# EAGLE board comboPolferYost (EAGLE 7.2.0)
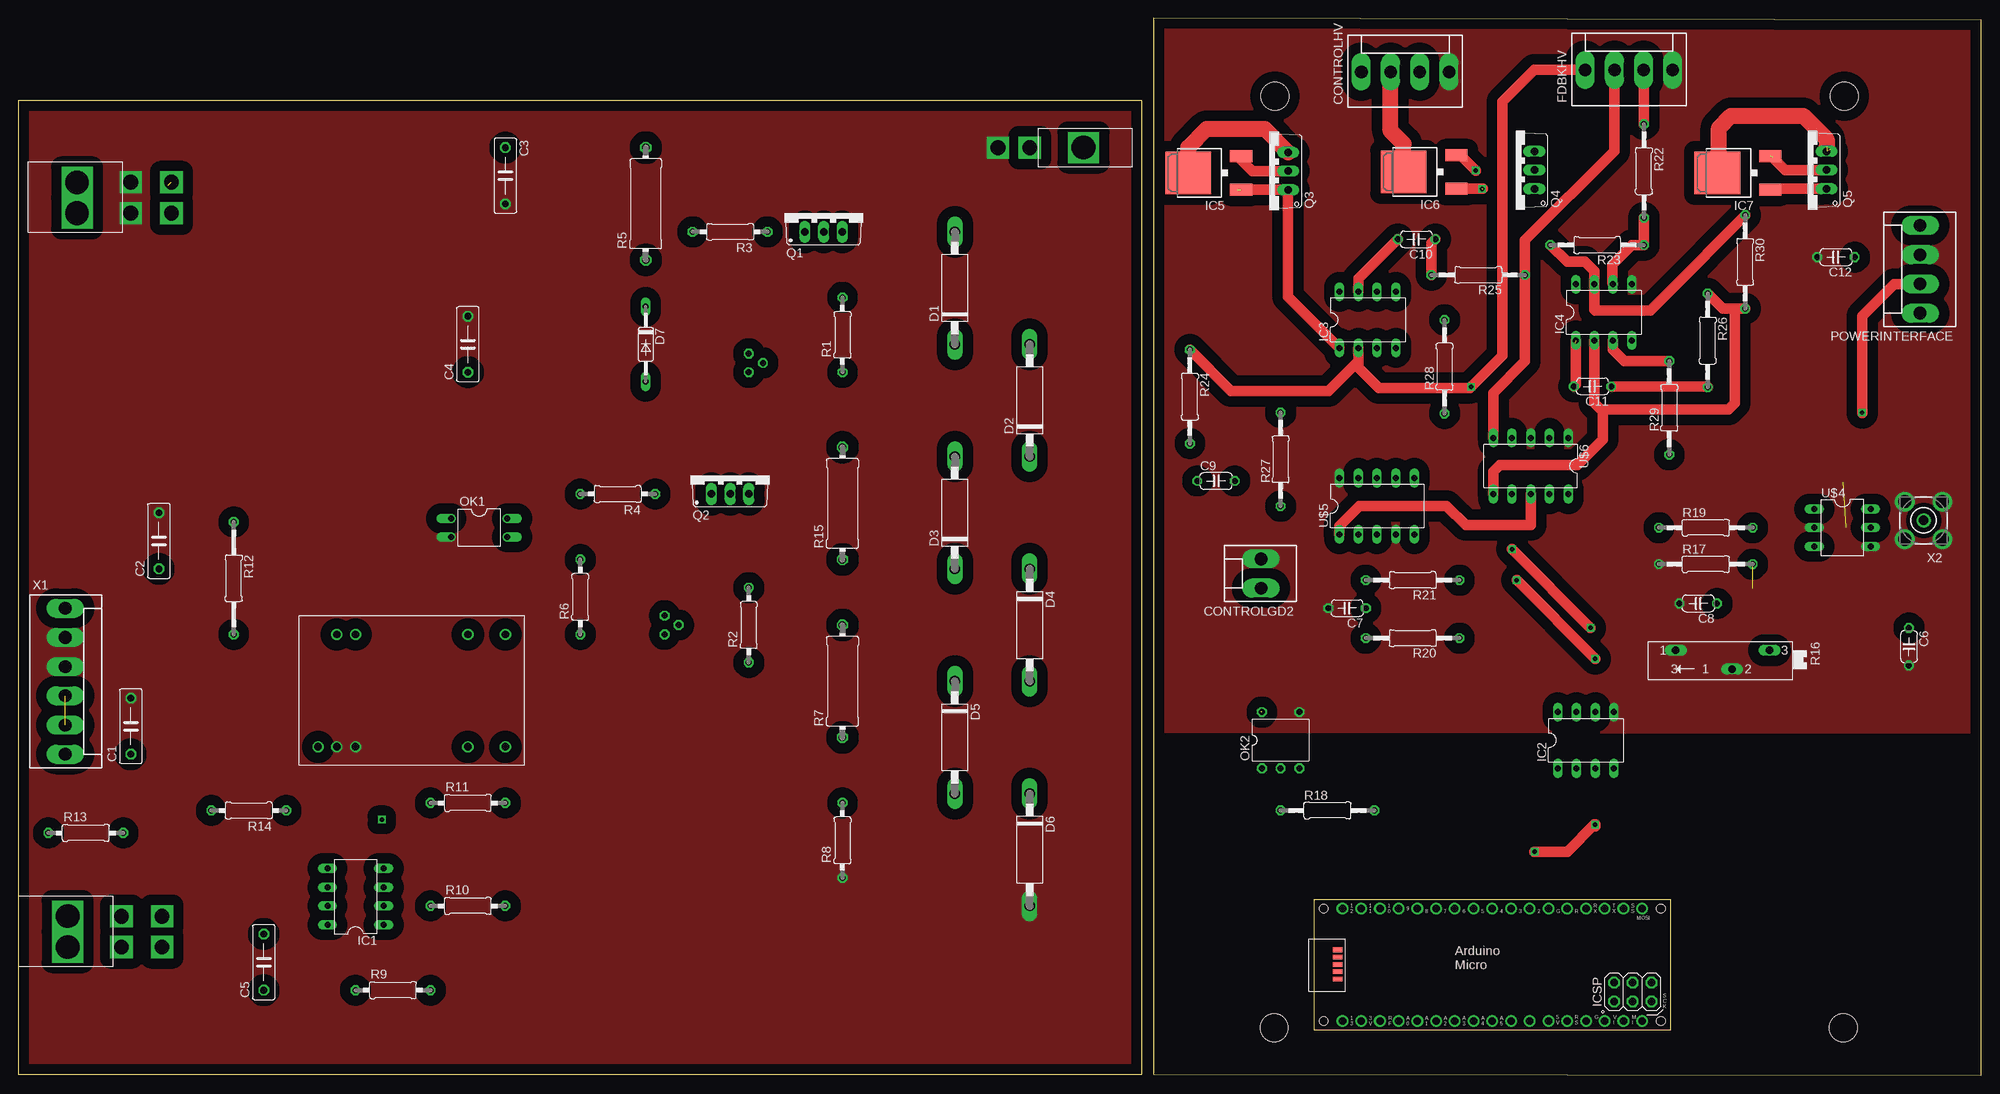
[diagram p0: board, top side]
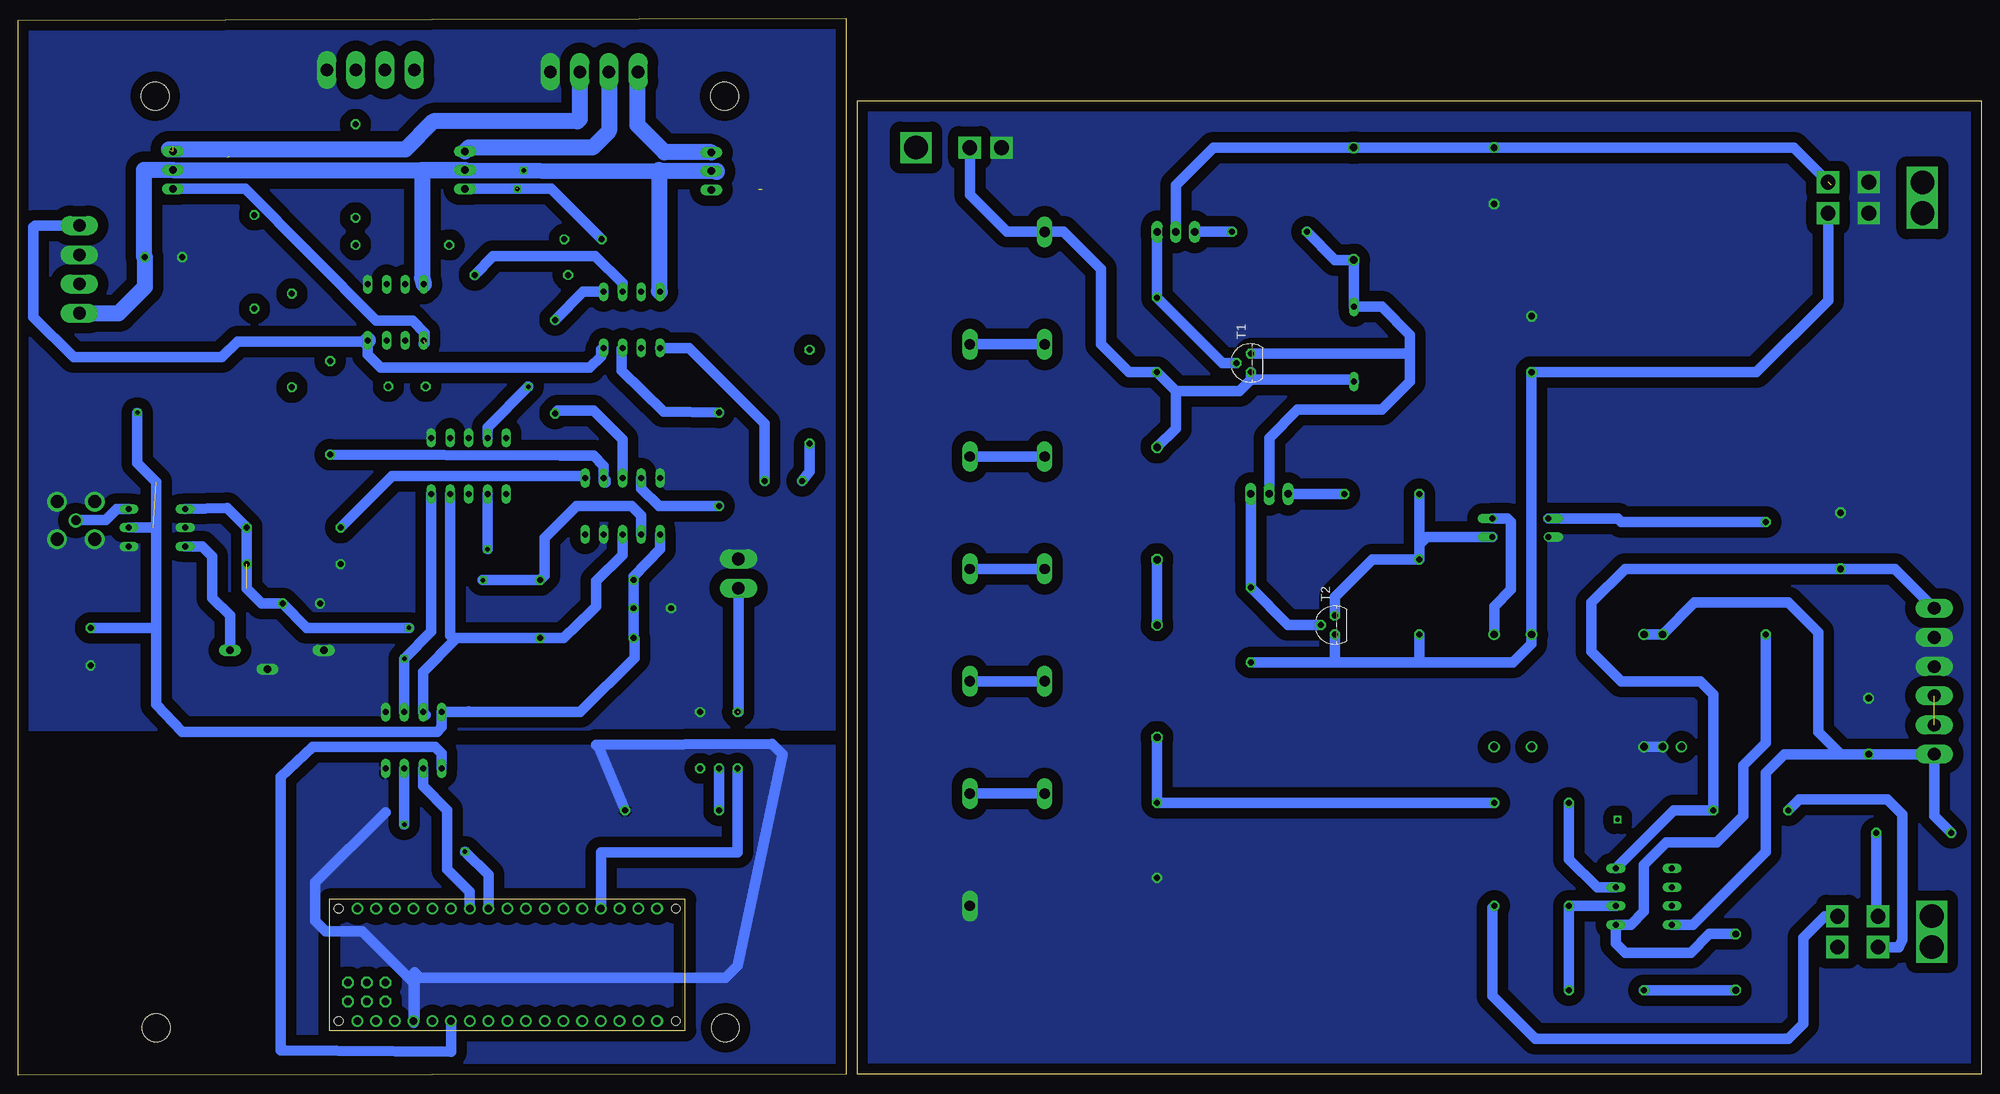
[diagram p1: board, bottom side, seen from below]

Size 266.19 x 143.38 mm. Coordinates in mm from the lower left corner, seen from the top.
Outline: 0,0.13 152.4,0.13 152.4,132.21 0,132.21 0,0.13
Outline: 153.92,0.13 266.19,0 266.19,143.13 153.92,143.38 153.92,0.13
Copper layers (1*16): Top 0.035mm / dielectric 1.5mm / Bottom 0.035mm
Design rules "default": minimum track width 10mil, minimum drill 24mil, track to track 8mil, track to pad 8mil, pad to pad 8mil, via to via 8mil, smd to smd 8mil, copper to edge 40mil, drill to drill 8mil, minimum pad ring 10mil, minimum via ring 8mil, stop-mask expansion 4mil, vias tented up to drill 0mil, thermal gap 10mil
Holes 3.8 mm at 247.52,6.48 247.65,132.84 170.43,132.84 170.31,6.48

## Footprints (pad centres in the part's own frame; a part is rotated, then mirrored left to right if it is on the bottom)
C075-032X103 = drill 0.914 octagon: 1 -3.81,0; 2 3.81,0
C050-024X044 = drill 0.813 octagon: 1 -2.54,0; 2 2.54,0
KK-156-2 = drill 1.7 pad 2.184 long: 1 -1.98,0; 2 1.98,0
KK-156-4 = drill 1.7 pad 2.184 long: 1 -5.94,0; 2 -1.98,0; 3 1.98,0; 4 5.94,0
CB417-15 = drill 1.397 long: A 7.62,0; C -7.62,0
DO35-10 = drill 0.813 long: A 5.08,0; C -5.08,0
NCS = drill 1: P$1 0,0; P$2 2.54,0; P$3 5.08,0; P$4 20.32,0; P$5 25.4,0; P$6 25.4,15.24; P$7 20.32,15.24; P$8 5.08,15.24; P$9 2.54,15.24
DIL08 = drill 0.813 long: 1 -3.81,-3.81; 2 -1.27,-3.81; 3 1.27,-3.81; 4 3.81,-3.81; 5 3.81,3.81; 6 1.27,3.81; 7 -1.27,3.81; 8 -3.81,3.81
DPACK = smd 1.6 x 3: 1 -2.28,-4.8; 3 2.28,-4.8 | smd 5.8 x 6.2: 4 0,2.38
DIL04 = drill 0.813 offset: 1 -1.27,-3.81; 2 1.27,-3.81; 3 1.27,3.81; 4 -1.27,3.81
DIL05 = drill 0.813 octagon: 1 -2.54,-3.81; 2 0,-3.81; 3 2.54,-3.81; 4 2.54,3.81; 6 -2.54,3.81
ARDUINO_MICRO = drill 1.016 pad 1.575: 3V3 6.35,1.27; +5V 31.75,1.27; A0 11.43,1.27; A1 13.97,1.27; A2 16.51,1.27; A3 19.05,1.27; A4 21.59,1.27; A5 24.13,1.27; D2 29.21,16.51; D3 26.67,16.51; D4 24.13,16.51; D5 21.59,16.51; D6 19.05,16.51; D7 16.51,16.51; D8 13.97,16.51; D9 11.43,16.51; D10 8.89,16.51; D11 6.35,16.51; D12 3.81,16.51; D13 3.81,1.27; GND 31.75,16.51; GND. 36.83,1.27; MISO] 41.91,1.27; MOSI 44.45,16.51; NC 26.67,1.27; NC. 29.21,1.27; REF 8.89,1.27; RST 34.29,16.51; RST. 34.29,1.27; RX1 36.83,16.51; SCK 44.45,1.27; SS 41.91,16.51; TX1 39.37,16.51; VIN 39.37,1.27 | drill 1.016 pad 1.575 octagon: 5V 40.64,6.477; GND_ 45.72,6.477; MISO. 40.64,3.937; MOSI. 43.18,6.477; RESET.. 45.72,3.937; SCK. 43.18,3.937 | smd 1.27 x 0.635: <USB>+V 3.15,10.947; <USB>D+ 3.15,9.957; <USB>D- 3.15,8.941; <USB>GND 3.15,6.96; <USB>ID 3.15,7.976 | hole 1.2: 1.27,1.27; 1.27,16.51; 46.99,16.51; 46.99,1.27
TO220BV = drill 1.016 long: D 0,-2.54; G -2.54,-2.54; S 2.54,-2.54
TO220V = drill 1.016 long: 1 -2.54,-2.54; 2 0,-2.54; 3 2.54,-2.54
0207/10 = drill 0.813 octagon: 1 -5.08,0; 2 5.08,0
0414/15 = drill 1.016 octagon: 1 -7.62,0; 2 7.62,0
0207/15 = drill 0.813 octagon: 1 -7.62,0; 2 7.62,0
SP19L = drill 1.016 long: A 5.715,-1.27; E -6.985,-1.27; S -1.905,1.27
0207/12 = drill 0.813 octagon: 1 -6.35,0; 2 6.35,0
TO92 = drill 0.813 octagon: 1 1.27,0; 2 0,1.905; 3 -1.27,0
5669-4 = drill 2 square: P$1 0,0; P$2 -4.191,0; P$3 0,5.512; P$4 -4.191,5.512 | drill 3.2 square: P$5 0,-7.29; P$6 -4.191,-7.29
5569-2 = drill 2 square: P$1 0,0; P$2 0,4.318 | drill 3.2 square: P$4 0,-7.29
DIL06 = drill 0.813 long: DIV 2.54,3.81; GND 0,-3.81; MOD -2.54,-3.81; OUT -2.54,3.81; SET 2.54,-3.81; VCC 0,3.81
DIL10 = drill 0.813 long: 1 -5.08,-3.81; 2 -2.54,-3.81; 3 0,-3.81; 4 2.54,-3.81; 5 5.08,-3.81; 6 5.08,3.81; 7 2.54,3.81; 8 0,3.81; 9 -2.54,3.81; 10 -5.08,3.81
KK-156-6 = drill 1.7 pad 2.184 long: 1 -9.9,0; 2 -5.94,0; 3 -1.98,0; 4 1.98,0; 5 5.94,0; 6 9.9,0
BU-SMA-V = drill 1.27: 1 0,0 | drill 1.778: 2 -2.55,2.55; 3 2.55,2.55; 4 2.55,-2.55; 5 -2.55,-2.55

## Placement (x,y rotation side)
C1  10n  [C075-032X103]  15.24,47.37 90 top
C2  10n  [C075-032X103]  19.05,72.52 90 top
C3  10n  [C075-032X103]  66.04,122.05 270 top
C4  10n  [C075-032X103]  60.96,99.19 90 top
C5  10n  [C075-032X103]  33.27,15.37 90 top
C6  10n  [C050-024X044]  256.41,58.17 270 top
C7  10n  [C050-024X044]  180.21,63.37 180 top
C8  10n  [C050-024X044]  227.84,64.01 180 top
C9  10n  [C050-024X044]  162.43,80.64 0 top
C10  10n  [C050-024X044]  189.61,113.41 180 top
C11  10n  [C050-024X044]  213.49,93.47 180 top
C12  10n  [C050-024X044]  246.51,111 180 top
CONTROLGD2  [KK-156-2]  168.53,68.07 90 top
CONTROLHV  [KK-156-4]  188.09,136.14 0 top
D1  P6KEXX  [CB417-15]  127,106.81 90 top
D2  P6KEXX  [CB417-15]  137.16,91.57 90 top
D3  P6KEXX  [CB417-15]  127,76.33 90 top
D4  P6KEXX  [CB417-15]  137.16,61.09 270 top
D5  P6KEXX  [CB417-15]  127,45.85 270 top
D6  P6KEXX  [CB417-15]  137.16,30.61 270 top
D7  1N4148DO35-10  [DO35-10]  85.09,99.19 270 top
DC1  [NCS]  40.64,44.58 0 top
FDBKHV  [KK-156-4]  218.44,136.4 0 top
IC1  LT1352PA  [DIL08]  45.72,24.26 90 top
IC2  ISO1540  [DIL08]  212.6,45.47 0 top
IC3  LT1352PA  [DIL08]  183.01,102.49 0 top
IC4  LT1352PA  [DIL08]  215.01,103.5 0 top
IC5  LM317MABDT  [DPACK]  161.04,122.43 90 top
IC6  LM317MABDT  [DPACK]  190.25,122.55 90 top
IC7  LM317MABDT  [DPACK]  232.79,122.43 90 top
OK1  PC817  [DIL04]  62.48,74.3 270 top
OK2  H11F1  [DIL05]  171.2,45.47 0 top
PCB1  ARDUINO_MICRO  [ARDUINO_MICRO]  175.77,6.1 0 top
POWERINTERFACE  [KK-156-4]  257.94,109.35 90 top
Q1  [TO220BV]  109.22,116.97 0 top
Q2  [TO220BV]  96.52,81.41 0 top
Q3  TIP122V  [TO220V]  169.67,122.68 90 top
Q4  TIP122V  [TO220V]  203.07,122.81 90 top
Q5  TIP122V  [TO220V]  242.7,122.81 90 top
R1  65  [0207/10]  111.76,100.46 90 top
R2  65  [0207/10]  99.06,61.09 90 top
R3  100  [0207/10]  96.52,114.43 180 top
R4  100  [0207/10]  81.28,78.87 180 top
R5  1M  [0414/15]  85.09,118.24 90 top
R6  100k  [0207/10]  76.2,64.9 90 top
R7  1M  [0414/15]  111.76,53.47 90 top
R8  50k  [0207/10]  111.76,31.88 90 top
R9  10k  [0207/10]  50.8,11.56 0 top
R10  10k  [0207/10]  60.96,22.99 0 top
R11  10k  [0207/10]  60.96,36.96 0 top
R12  250  [0207/15]  29.21,67.44 270 top
R13  20k  [0207/10]  9.14,32.89 0 top
R14  20k  [0207/10]  31.24,35.94 180 top
R15  1M  [0414/15]  111.76,77.6 90 top
R16  100k  [SP19L]  230.5,56.39 180 top
R17  10k  [0207/12]  228.85,69.34 0 top
R18  100  [0207/12]  177.55,35.94 0 top
R19  40k  [0207/12]  228.85,74.3 0 top
R20  1.5k  [0207/12]  189.1,59.31 180 top
R21  1.5k  [0207/12]  189.1,67.18 180 top
R22  20k  [0207/12]  220.47,122.68 270 top
R23  20k  [0207/12]  214.12,112.65 180 top
R24  10k  [0207/12]  158.88,92.07 270 top
R25  10k  [0207/12]  197.99,108.58 180 top
R26  10k  [0207/12]  229.11,99.69 270 top
R27  10k  [0207/12]  171.2,83.57 90 top
R28  10k  [0207/12]  193.42,96.14 90 top
R29  10k  [0207/12]  223.9,90.55 90 top
R30  10k  [0207/12]  234.19,110.36 270 top
T1  2N3904  [TO92]  99.06,96.65 90 bottom
T2  2N3904  [TO92]  87.63,61.09 90 bottom
U$1  5569-4  [5669-4]  13.97,17.4 270 top
U$2  5569-4  [5669-4]  15.24,116.97 270 top
U$3  5569-2  [5569-2]  137.16,125.86 90 top
U$4  LTC6992  [DIL06]  247.4,74.3 270 top
U$5  MCP4728DIL  [DIL10]  184.28,77.22 0 top
U$6  ADS1015DIL  [DIL10]  205.1,82.68 180 top
X1  [KK-156-6]  6.35,53.47 270 top
X2  BU-SMA-V  [BU-SMA-V]  258.39,75.29 180 top

## Library data of the parts
C1-C5 C7 R1-R4 R6 R8-R14 R18 = rcl
C6 C8-C12 R5 R7 R15 R17 R19-R30 = resistor
CONTROLGD2 CONTROLHV FDBKHV POWERINTERFACE X1 = con-molex; OC_FARNELL: unknown; OC_NEWARK: unknown
D1-D7 = diode
DC1 = dc-dc-converter
IC1 IC3 IC4 = linear-technology; OC_FARNELL: unknown; OC_NEWARK: unknown
IC2 U$6 = texas
IC5-IC7 = v-reg
OK1 = optocoupler; MPN: PC817X4J000F; OC_FARNELL: 9707727; OC_NEWARK: 97K7059
OK2 = optocoupler; OC_FARNELL: unknown; OC_NEWARK: unknown
PCB1 = E14_Arduino_published
Q1 Q2 = transistor-power
Q3-Q5 = transistor-npn
R16 = pot
T1 T2 = transistor
U$1-U$3 = con-molex
U$4 = linear-technology
U$5 = microchip
X2 = con-coax; OC_FARNELL: unknown; OC_NEWARK: unknown

## Nets
+5V: X1.4 X1.5
+12V: C12.1 IC3.8 IC4.8 IC5.3 IC6.3 IC7.3 POWERINTERFACE.1 Q3.2 Q4.2 Q5.2
+15V: C1.1 DC1.P$8 DC1.P$9 IC1.8 R13.1 X1.6
-5V: IC3.4 IC4.4 POWERINTERFACE.4
-15V: C2.1 IC1.4 R14.1 X1.1
A+5: IC2.1 PCB1.+5V
AGND: IC2.4 PCB1.GND. R18.2
D4: PCB1.D4
D7: PCB1.D7
D8: PCB1.D8
D10: PCB1.D10
D11: PCB1.D11
ENSW2: CONTROLGD2.1 OK2.6
GND: C1.2 C2.2 C3.2 C4.2 D6.A DC1.P$2 DC1.P$3 OK1.2 R8.1 U$2.P$1 U$2.P$2 U$3.P$2 X1.2 X1.3
GND1: C6.2 C7.2 C8.2 C12.2 CONTROLGD2.2 CONTROLHV.4 FDBKHV.4 IC2.5 IC4.5 OK2.4 POWERINTERFACE.3 R16.A R16.S R17.1 U$4.DIV U$4.GND U$5.4 U$5.10 U$6.1 U$6.3 X2.2 X2.3 X2.4 X2.5
N$1: D1.C D2.A
N$2: D2.C D3.A
N$3: D3.C D4.C
N$4: D4.A D5.C
N$5: D5.A D6.C
N$6: Q1.G R3.1
N$7: D7.C Q2.D R3.2 R5.1 T1.1
N$8: Q1.S R1.2 T1.2
N$9: R13.2 U$1.P$2
N$10: D1.A D7.A R1.1 R15.2 T1.3 U$3.P$1
N$11: Q2.G R4.1
N$12: OK1.3 R4.2 R6.2 T2.1
N$13: R10.2 U$1.P$4
N$14: Q2.S R2.2 T2.2
N$16: DC1.P$6 OK1.4
N$17: C5.1 R9.1
N$18: IC1.2 R9.2 R10.1
N$19: C5.2 IC1.1 R12.2
N$20: IC1.3 R11.1
N$21: R7.1 R8.2 R11.2
N$22: R16.E U$4.SET
N$23: R7.2 R15.1
N$24: R14.2 U$1.P$1
N$25: OK1.1 R12.1
N$26: U$4.OUT X2.1
N$27: IC4.7 R23.2 R30.1
N$28: IC3.5 R28.2
N$29: IC4.3 R29.2
N$30: R19.1 U$5.6
N$31: C9.2 IC3.1 IC5.1 Q3.1
N$33: CONTROLHV.1 IC5.4 Q3.3
N$34: C10.2 IC3.7 IC6.1 Q4.1
N$35: FDBKHV.3 R22.1
N$36: IC4.6 R22.2 R23.1
N$37: C11.2 IC4.1 IC7.1 Q5.1
N$38: OK2.2 R18.1
N$39: C9.1 R24.2
N$40: C10.1 R25.2
N$41: C11.1 R26.2
N$42: IC3.3 R27.2
N$43: R27.1 U$5.9
N$44: R29.1 U$5.7
N$45: R28.1 U$5.8
N$46: CONTROLHV.3 IC7.4 Q5.3
N$47: CONTROLHV.2 IC6.4 Q4.3
PWM5: PCB1.D5
PWM6: PCB1.D6
PWM9: OK2.1 PCB1.D9
RDBK1: FDBKHV.1 IC3.2 R24.1 U$6.4
RDBK2: FDBKHV.2 IC3.6 R25.1 U$6.5
RDBK3: IC4.2 R26.1 R30.2 U$6.6
RDBK4: C8.1 R17.2 R19.2 U$4.MOD U$6.7
SCL: IC2.3 PCB1.D3
SCL_OUT: IC2.6 R21.1 U$5.2 U$6.10
SDA: IC2.2 PCB1.D2
SDA_OUT: IC2.7 R20.1 U$5.3 U$6.9
V+: C3.1 Q1.D R5.2 U$2.P$4
V-: C4.1 DC1.P$7 R2.1 R6.1 T2.3 U$2.P$3
VCC: C6.1 C7.1 IC2.8 POWERINTERFACE.2 R20.2 R21.2 U$4.VCC U$5.1 U$6.8

## Tracks (layer width: path | path; a pad name or v marks a point on that pad's centre or on a via)
+5V  (1 unrouted)
+12V  (via drill 0.6)  (1 unrouted)
  Top 1.422: IC5.3 165.84,124.23 167.39,122.68 Q3.2 | IC6.3 195.59,124.83 v197.66,122.76 | Q5.2 239.65,122.81 237.87,124.59 237.11,124.59
  Bottom 1.422: v197.66,122.76 205.56,122.76 Q4.2
  Bottom 2.184: 211.46,122.81 Q5.2 249.17,122.81 249.17,111.12 C12.1 249.05,106.93 252.6,103.38 252.63,103.41 POWERINTERFACE.1 | 211.46,122.81 179.2,122.68 | Q3.2 171.45,122.68 171.45,122.58 | Q3.2 179.2,122.68 | 179.2,122.68 179.32,122.81 179.32,106.43 IC3.8 | Q4.2 211.46,122.81 | 211.46,122.81 211.46,108.2 IC4.8 | 171.45,122.55 Q3.2
+15V
  Bottom 1.422: R13.1 6.35,35.18 X1.6 C1.1 19.05,43.56 | 19.05,43.56 22.1,46.61 22.1,60.07 26.16,64.13 38.86,64.13 DC1.P$9 DC1.P$8 | 19.05,43.56 26.67,43.56 29.21,41.02 29.21,30.35 39.12,20.45 IC1.8
-5V
  Bottom 1.422: IC3.4 186.94,98.68 187.2,98.42 187.2,97.54 188.72,96.01 217.04,96.01 218.82,97.79 IC4.4 | POWERINTERFACE.4 263.94,115.29 264.16,115.06 264.16,102.87 258.7,97.41 238.63,97.41 236.47,99.57 218.95,99.57
  Bottom 2.184: 218.95,99.57 IC4.4
-15V
  Bottom 1.422: IC1.4 41.66,35.94 R14.1 36.32,51.69 38.1,53.47 48.77,53.47 52.83,57.53 52.83,64.13 48.26,68.71 C2.1 11.69,68.71 X1.1
A+5
  Bottom 1.422: PCB1.+5V 207.52,3.17 230.63,3.43 230.63,40.51 226.31,44.58 209.68,44.58 208.79,43.69 IC2.1
AGND
  Bottom 1.422: 216.41,35.69 225.93,26.16 225.93,20.95 224.54,19.56 219.58,19.56 212.6,12.57 PCB1.GND. | PCB1.GND. 212.6,7.11 | R18.2 187.45,44.45 187.83,44.83 163.96,44.96 162.56,43.56 168.66,14.86 170.31,13.21 211.71,13.21 212.47,13.97 212.47,7.49 PCB1.GND.
  pour Bottom (isolate 1.422): 153.8,0.25 266.45,0.25 266.45,44.83 153.92,44.7
ENSW2  (1 unrouted)
  Bottom 1.422: CONTROLGD2.1 168.53,49.28
GND
  Bottom 1.422: DC1.P$3 DC1.P$2
  pour Bottom (isolate 1.422, no thermals): 0,0.13 152.4,0.13 152.15,132.46 0,132.21
  pour Top (isolate 1.422, no thermals): 0,132.21 152.15,132.46 152.4,-0.13 0,-0.13
GND1
  pour Bottom (isolate 1.422, no thermals): 153.92,143.13 266.19,143 266.19,46.86 153.92,46.99
  pour Top (isolate 1.422, no thermals): 153.92,143.26 266.32,143.13 266.32,46.48 153.92,46.61
N$1
  Bottom 1.422: D1.C D2.A
N$2
  Bottom 1.422: D2.C D3.A
N$3
  Bottom 1.422: D3.C D4.C
N$4
  Bottom 1.422: D4.A D5.C
N$5
  Bottom 1.422: D5.A D6.C
N$6
  Bottom 1.422: Q1.G R3.1
N$7
  Bottom 1.422: R3.2 87.63,110.62 R5.1 D7.C 81.28,104.27 77.47,100.46 77.47,98.17 | Q2.D 96.52,86.49 92.71,90.3 81.28,90.3 77.47,94.11 77.47,98.17 | T1.1 77.72,97.92 77.47,98.17
N$8
  Bottom 1.422: T1.2 102.87,96.65 R1.2 Q1.S
N$9
  Bottom 1.422: R13.2 14.22,21.84 U$1.P$2
N$10
  Bottom 1.422: U$3.P$1 137.16,119.51 132.08,114.43 D1.A 124.46,114.43 119.38,109.35 119.38,99.19 115.57,95.38 R1.1 109.22,92.84 | T1.3 99.06,94.36 | 99.06,94.36 100.58,92.84 109.22,92.84 | 109.22,92.84 109.22,87.76 R15.2 | 99.06,94.36 85.34,94.36 D7.A
N$11
  Bottom 1.422: Q2.G R4.1
N$12
  Bottom 1.422: R4.2 76.2,72.26 | 76.2,72.26 76.2,72.01 | 76.2,72.01 R6.2 82.55,69.98 87.63,64.9 T2.1 | 75.95,72.52 76.2,72.26 | OK1.3 75.18,73.02 76.2,72.01
N$13
  Bottom 1.422: U$1.P$4 21.21,21.59 24.13,18.67 24.13,6.98 26.16,4.95 60.45,4.95 66.29,10.79 66.29,22.73 R10.2
N$14
  Bottom 1.422: T2.2 93.98,61.09 R2.2 Q2.S
N$15  (via drill 0.6)
  other vias: 49.28,34.67
N$16
  Bottom 1.422: DC1.P$6 66.04,63.63 63.75,65.91 63.75,75.06 64.26,75.56 OK1.4
N$17
  Bottom 1.422: R9.1 C5.1
N$18
  Bottom 1.422: IC1.2 R10.1 R9.2
N$19
  Bottom 1.422: C5.2 36.83,19.18 39.37,16.64 48.26,16.64 49.53,17.91 IC1.1 47.5,20.45 45.72,22.22 45.72,28.57 42.67,31.62 35.81,31.62 32.26,35.18 32.26,42.04 29.21,45.09 R12.2
N$20
  Bottom 1.422: R11.1 55.88,29.34 52.07,25.53 IC1.3
N$21
  Bottom 1.422: R7.1 R8.2 R11.2
N$22
  Bottom 1.422: R16.E 237.49,62.36 239.9,64.77 239.9,70.36 241.3,71.75 U$4.SET
N$23
  Bottom 1.422: R15.1 R7.2
N$24
  Bottom 1.422: U$1.P$1 11.18,17.4 10.67,18.41 10.67,35.43 12.7,37.47 24.64,37.47 R14.2
N$25
  Bottom 1.422: R12.1 48.77,75.06 49.28,75.56 OK1.1
N$26
  Bottom 1.422: X2.1 258.12,75.31 254.38,75.31 252.86,76.83 U$4.OUT
N$27
  Top 1.422: R30.1 223.65,106.05 221.36,103.76 213.87,103.76 213.74,103.89 IC4.7 213.74,109.09 212.47,110.36 210.06,110.36 R23.2
N$28
  Bottom 1.422: IC3.5 189.61,106.3 R28.2
N$29
  Top 1.422: IC4.3 216.28,98.42 217.81,96.9 R29.2
N$30
  Bottom 1.422: R19.1 215.52,81.28 189.61,81.28 U$5.6
N$31  (1 unrouted)
  Top 1.422: IC3.1 172.21,105.66 Q3.1 165.35,120.14 165.23,120.02
  Bottom 1.422: IC3.1 175.26,98.68 164.97,88.39 C9.2
N$33
  Top 2.184: IC5.4 158.66,125.89 161.16,128.4 169.04,128.4 Q3.3
  Bottom 2.184: Q3.3 178.56,125.22 182.25,128.91 182.25,136.05 CONTROLHV.1
N$34  (via drill 0.6)  (1 unrouted)
  Top 1.422: IC3.7 181.74,108.08 C10.2 | IC6.1 198.62,120.27 197.87,120.27
  Bottom 1.422: Q4.1 v198.5,120.27 193.93,120.27 C10.2
N$35
  Top 1.422: R22.1 220.47,136.35 FDBKHV.3
N$36
  Top 1.422: IC4.6 216.15,107.44 216.15,109.98 218.82,112.65 R23.1 R22.2
N$37  (1 unrouted)
  Top 1.422: IC4.1 211.2,93.73 C11.2 | IC7.1 237.71,120.27 Q5.1
  Bottom 1.422: Q5.1 235.46,120.27 217.68,102.36 212.72,102.36 211.07,100.71 211.07,99.31 211.2,99.19
N$38
  Bottom 1.422: R18.1 OK2.2
N$39
  Bottom 1.422: C9.1 158.88,81.91 R24.2
N$40
  Top 1.422: R25.2 191.64,112.9 C10.1
N$41
  Top 1.422: C11.1 228.98,93.47 R26.2
N$42
  Bottom 1.422: R27.2 178.69,90.04 184.4,95.63 184.4,98.55 IC3.3
N$43
  Bottom 1.422: R27.1 179.32,77.22 181.74,79.63 U$5.9
N$44
  Bottom 1.422: R29.1 192.66,84.07 188.21,84.07 186.82,82.68 U$5.7 | U$5.7 186.82,80.64 186.56,80.39 186.56,80.77 U$5.7
N$45
  Bottom 1.422: U$5.8 184.28,86.23 188.21,90.17 193.04,90.17 R28.1
N$46  (2 unrouted)
  Top 2.184: IC7.4 230.63,122.65 230.63,128.52 232.28,130.18 242.06,130.18 245.24,127 245.24,125.98
  Bottom 2.184: CONTROLHV.3 190.07,129.72 190.37,129.41 209.93,129.41 213.74,125.6 245.75,125.6
N$47
  Top 2.184: IC6.4 187.87,126.38 186.11,128.14 CONTROLHV.2
  Bottom 2.184: CONTROLHV.2 186.11,128.09 188.34,125.86 205.1,125.86 Q4.3
PWM9
  Bottom 1.422: PCB1.D9 187.2,30.23 168.66,30.23 OK2.1
RDBK1  (via drill 0.6)
  Top 1.422: FDBKHV.1 205.61,136.4 201.29,132.08 201.29,97.66 v197.04,93.41 196.85,93.22 184.53,93.22 181.74,96.01 IC3.2 181.74,96.9 177.67,92.84 164.47,92.84 R24.1
  Bottom 1.422: U$6.4 202.56,87.88 v197.04,93.41
RDBK2
  Top 1.422: FDBKHV.2 216.46,125.4 204.34,113.28 R25.1 204.34,96.9 200.03,92.58 U$6.5
  Bottom 1.422: IC3.6 184.28,107.44 187.96,111.12 201.8,111.12 R25.1
RDBK3
  Top 1.422: R26.1 231.14,104.01 232.79,104.01 | 232.79,104.01 R30.2 | IC4.2 213.74,91.19 214.63,90.3 214.88,90.3 | 214.88,90.3 231.9,90.3 232.79,91.19 232.79,104.01 | U$6.6 200.03,81.91 200.91,82.8 211.46,82.8 214.88,86.23 214.88,90.3
RDBK4  (via drill 0.6)  (1 unrouted)
  Top 1.422: v202.56,71.37 v213.23,60.71
  Bottom 1.422: U$6.7 v202.56,71.37 | v213.23,60.71 227.08,60.71 C8.1 233.17,64.01 235.2,66.04 R19.2 237.87,76.96 U$4.MOD
SCL  (via drill 0.6)
  Top 1.422: v205.61,30.35 210.06,30.35 213.74,34.04 213.87,33.78 v213.87,34.04
  Bottom 1.422: PCB1.D3 202.44,27.18 v205.61,30.35 | v213.87,34.04 IC2.3
SCL_OUT  (via drill 0.6)
  Top 1.422: v203.2,67.18 v213.87,56.52
  Bottom 1.422: v203.2,67.18 R21.1 194.82,67.82 194.82,72.9 190.5,77.22 183.01,77.22 181.74,75.95 U$5.2 | IC2.6 v213.87,56.52 210.19,60.2 U$6.10
SDA
  Bottom 1.422: PCB1.D2 204.98,24.89 208.03,27.94 208.03,35.94 211.33,39.24 IC2.2
SDA_OUT
  Bottom 1.422: 207.01,59.05 211.33,54.74 IC2.7 210.95,48.9 | 207.01,59.05 206.76,59.31 R20.1 192.28,59.31 188.47,62.99 187.83,63.63 187.83,67.06 184.28,70.61 U$5.3 | U$6.9 207.65,59.69 207.01,59.05
V+  (1 unrouted)
  Bottom 1.422: Q1.D 109.22,120.78 104.14,125.86 R5.2 C3.1 25.4,125.86 20.32,120.78
V-
  Bottom 1.422: 87.63,56.01 76.2,56.01 | R2.1 87.63,56.01 | 76.2,56.01 63.5,56.01 60.96,58.55 DC1.P$7 C4.1 30.48,95.38 20.75,105.1 U$2.P$3 | 76.2,56.01 R6.1 | T2.3 87.63,56.01
VCC  (via drill 0.6)  (2 unrouted)
  Top 1.422: POWERINTERFACE.2 254.43,107.37 250.06,103 v250.06,89.92 250.06,89.84 | U$6.8 205.1,74.68 196.34,74.68 193.68,77.22 181.86,77.22 179.2,74.55 U$5.1
  Bottom 1.422: C6.1 247.52,60.71 | 247.52,60.71 247.52,80.52 250.06,83.06 250.06,89.84 | 247.52,60.71 247.52,50.29 243.97,46.61 209.42,46.61 208.79,47.24 IC2.8 204.98,49.28 | 204.98,49.28 189.99,49.28 182.63,56.64 182.63,59.18 R20.2 C7.1 R21.2 182.75,67.69 179.2,71.37 U$5.1 | 205.1,49.4 204.98,49.28 | U$4.VCC 247.9,74.3

## Text on the board
tDocu: 2n3904 are on reverse side!!! | 2n3904 are on reverse side!!!